# EAGLE board radical-pneu (EAGLE 7.2.0)
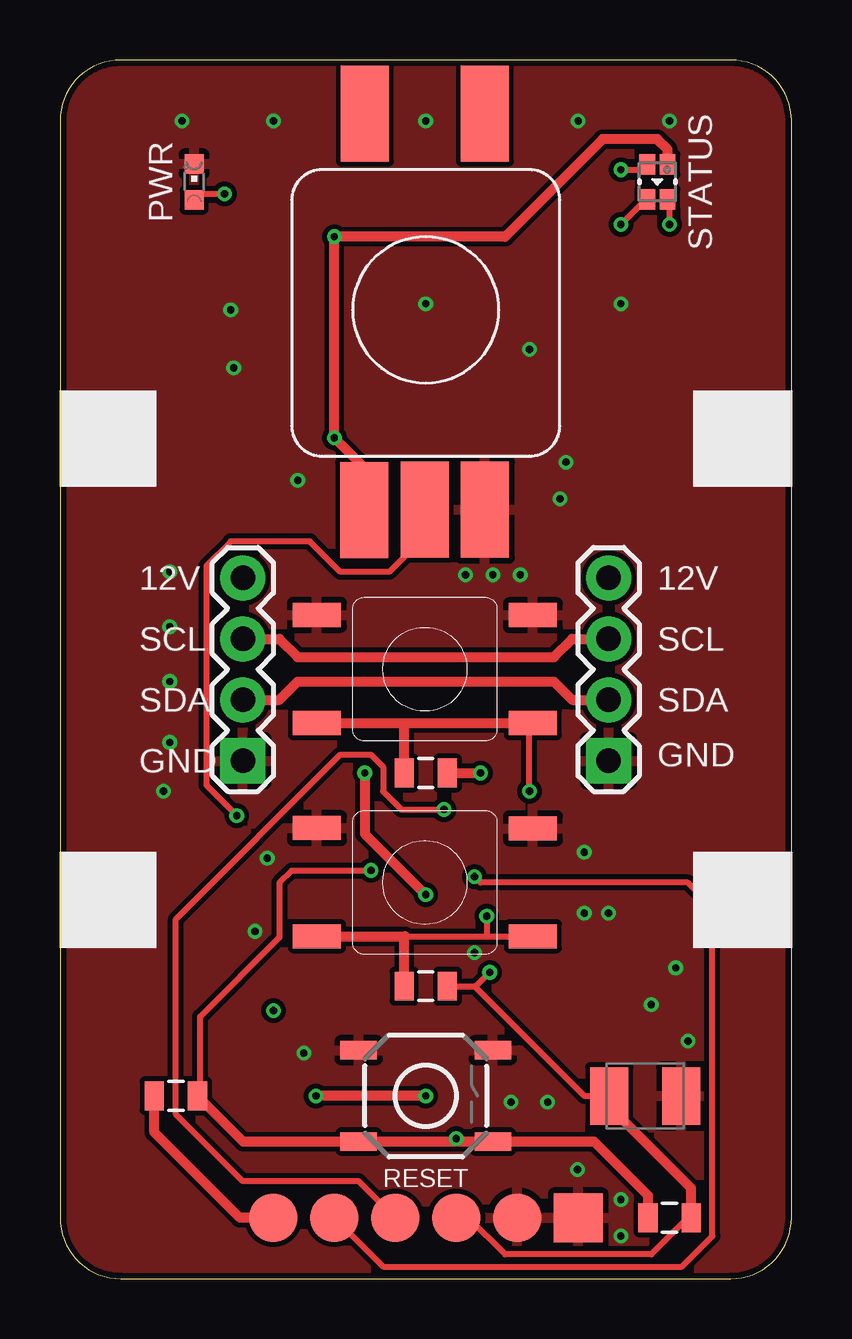
[diagram p0: board, top side]
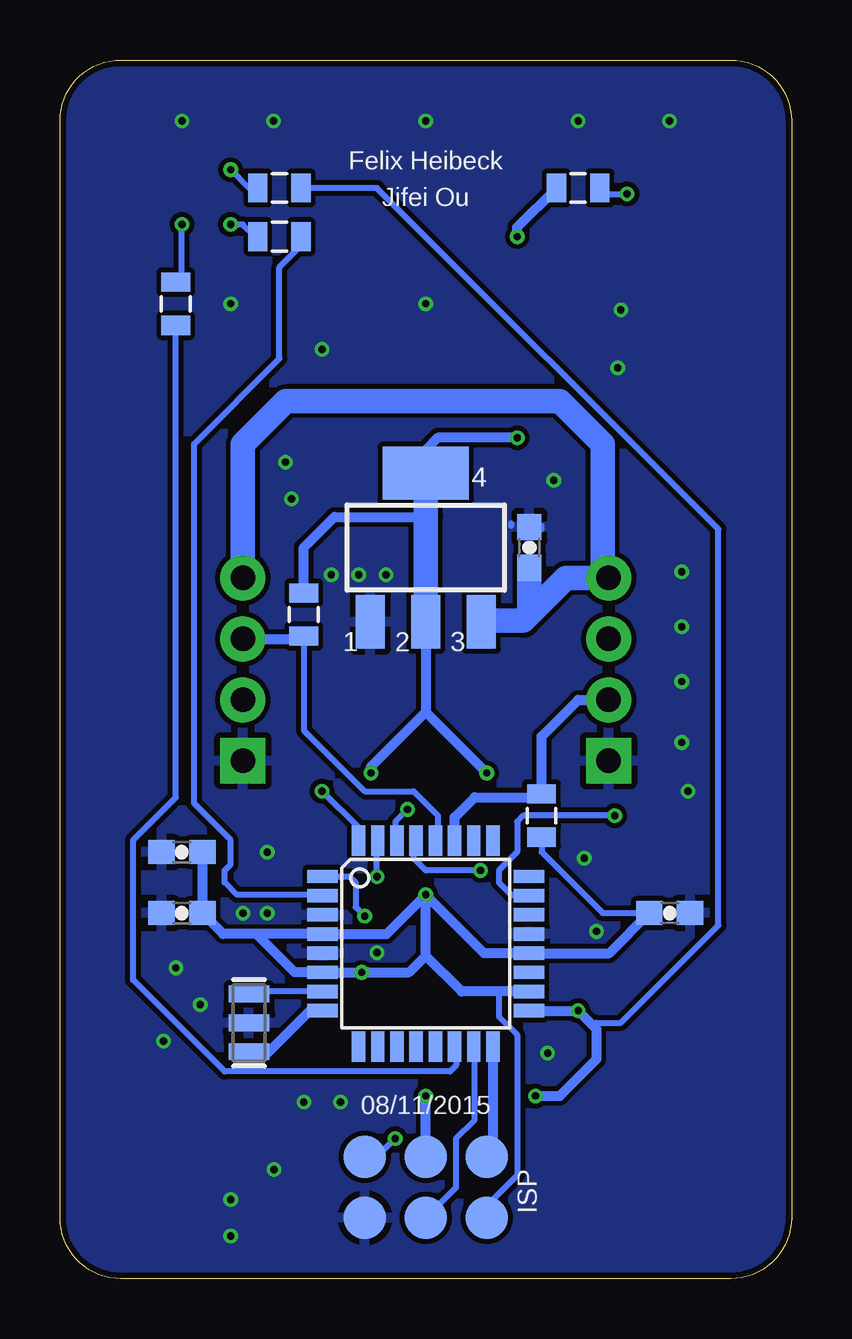
[diagram p1: board, bottom side, seen from below]

Size 30.48 x 50.8 mm. Coordinates in mm from the lower left corner, seen from the top.
Outline: 2.54,0 27.94,0 arc90 30.48,2.54 30.48,48.26 arc90 27.94,50.8 2.54,50.8 arc90 0,48.26 0,2.54 arc90 2.54,0
Copper layers (1*16): Top 0.035mm / dielectric 1.5mm / Bottom 0.035mm
Design rules "autoroute-10mil *": minimum track width 10mil, minimum drill 12mil, track to track 8mil, track to pad 8mil, pad to pad 8mil, via to via 8mil, smd to smd 0mil, copper to edge 10mil, drill to drill 10mil, minimum pad ring 10mil, minimum via ring 6mil, stop-mask expansion 2mil, vias tented up to drill 100mil, thermal gap 10mil
Net classes: 1 vcc: width 0.254 mm

## Footprints (pad centres in the part's own frame; a part is rotated, then mirrored left to right if it is on the bottom)
0603-CAP = smd 1.1 x 1: 1 -0.85,0; 2 0.85,0
SMC_B = smd 1.6 x 2.4: + -1.5,0; - 1.5,0
0805 = smd 0.8 x 1.2: 1 -0.9,0; 2 0.9,0
TQFP32-08 = smd 1.27 x 0.559: 1 -4.293,2.8; 2 -4.293,2; 3 -4.293,1.2; 4 -4.293,0.4; 5 -4.293,-0.4; 6 -4.293,-1.2; 7 -4.293,-2; 8 -4.293,-2.8; 17 4.293,-2.8; 18 4.293,-2; 19 4.293,-1.2; 20 4.293,-0.4; 21 4.293,0.4; 22 4.293,1.2; 23 4.293,2; 24 4.293,2.8 | smd 0.559 x 1.27: 9 -2.8,-4.293; 10 -2,-4.293; 11 -1.2,-4.293; 12 -0.4,-4.293; 13 0.4,-4.293; 14 1.2,-4.293; 15 2,-4.293; 16 2.8,-4.293; 25 2.8,4.293; 26 2,4.293; 27 1.2,4.293; 28 0.4,4.293; 29 -0.4,4.293; 30 -1.2,4.293; 31 -2,4.293; 32 -2.8,4.293
1X04 = drill 1.016 pad 1.88 square: 1 0,0 | drill 1.016 pad 1.88: 2 2.54,0; 3 5.08,0; 4 7.62,0
CHIPLED_0603 = smd 0.8 x 0.8: A 0,-0.75; C 0,0.75
RESONATOR-SMD = smd 0.7 x 1.7: 1 -1.2,0; 2 0,0; 3 1.2,0
TACTILE-SWITCH-SMD = smd 1.524 x 0.762: 1 -2.794,1.905; 2 2.794,1.905; 3 -2.794,-1.905; 4 2.794,-1.905
LINEAR_SOT223 = smd 1.219 x 2.235: 1 -2.311,-3.099; 2 0,-3.099; 3 2.311,-3.099 | smd 3.6 x 2.2: 4 0,3.099
SWITCH-11MM = smd 2 x 1: A -4.46,2.24; B -4.46,-2.26; D 4.54,-2.27; H 4.54,2.24
PRS11S = smd 2 x 4: 1 -2.565,-8.611; 2 -0.051,-8.585; 3 2.464,-8.585; 4 -2.54,7.925; 5 2.464,7.925
POGO_ISP = smd 1.778 x 1.778: 1 -1.27,2.54; 2 1.27,2.54; 3 -1.27,0; 4 1.27,0; 5 -1.27,-2.54; 6 1.27,-2.54
FTDI_POGO = smd 2.032 x 2.032: 1 -6.35,0; 2 -3.81,0; 3 -1.27,0; 4 1.27,0; 5 3.81,0; 6 6.35,0
LTST = smd 0.65 x 0.85: + 0.425,0.725; B -0.425,0.725; G 0.425,-0.725; R -0.425,-0.725

## Placement (x,y rotation side)
C1  0.1uF  [0603-CAP]  10.92,30.48 90 bottom
C2  0.1uF  [0603-CAP]  5.08,15.24 0 bottom
C3  22uF  [SMC_B]  24.38,7.62 0 top
C5  0.1uF  [0805]  4.83,7.62 180 top
C8  0.1uF  [0603-CAP]  25.4,15.24 180 bottom
C10  0.1uF  [0603-CAP]  25.4,17.78 180 bottom
IC3  ATMEGA328  [TQFP32-08]  15.24,13.97 0 bottom
JP2  [1X04]  22.86,21.59 90 top
JP3  [1X04]  7.62,21.59 90 top
PWR  [CHIPLED_0603]  5.59,45.72 0 top
Q1  16Mhz  [RESONATOR-SMD]  22.61,10.67 90 bottom
R1  10K  [0805]  15.24,21.08 180 top
R2  10K  [0805]  15.24,12.19 180 top
R3  10K  [0805]  25.4,2.54 180 top
R5  4.7k  [0805]  10.41,19.3 90 bottom
R6  4.7k  [0805]  20.32,27.69 90 bottom
R9  1k  [0805]  21.34,43.43 0 bottom
R11  1k  [0805]  8.89,45.47 180 bottom
R12  1k  [0805]  25.65,40.64 270 bottom
R13  1k  [0805]  21.34,45.47 0 bottom
S1  TAC_SWITCHSMD  [TACTILE-SWITCH-SMD]  15.24,7.62 0 top
U2  NCP1117-5  [LINEAR_SOT223]  15.24,30.48 0 bottom
U$1  RS-014R05  [SWITCH-11MM]  15.24,25.4 180 top
U$2  PRS11S  [PRS11S]  15.24,40.64 0 top
U$3  RS-014R05  [SWITCH-11MM]  15.24,16.51 180 top
U$10  ISP_POGO  [POGO_ISP]  15.24,3.81 270 bottom
U$12  FTDI_POGO  [FTDI_POGO]  15.24,2.54 0 top
U$21  LTST-C19FD1WT  [LTST]  24.89,45.72 0 top

## Library data of the parts
C1 C2 C5 C8 C10 = SparkFun-Capacitors
C3 = rcl
IC3 Q1 = SparkFun
JP2 JP3 = SparkFun-Connectors
PWR = adafruit
R1-R3 R5 R6 R9 R11-R13 = SparkFun-Resistors
S1 = SparkFun-Electromechanical; PROD_ID: SWCH-08247
U2 = SmartPrj
U$1-U$3 U$10 U$12 U$21 = digikey

## Nets
+5V: C2.1 C3.+ C8.1 C10.1 IC3.4 IC3.6 IC3.18 IC3.20 R1.1 R2.1 R3.1 R5.1 R6.2 R11.2 U2.2 U2.4 U$2.1 U$10.2 U$12.4 U$21.+
A0/POT: IC3.23 U$2.2
D2/BTN: IC3.32 R1.2 U$1.A U$1.H
D3/BTN: IC3.1 R2.2 U$3.A U$3.H
D4: IC3.2 R9.2
D5: IC3.9
D6: IC3.10
D7: IC3.11
D8: IC3.12
D9: IC3.13
D10: IC3.14 R12.2
DTR: C5.2 U$12.1
GND: C1.2 C2.2 C3.- C8.2 C10.2 IC3.3 IC3.5 IC3.21 JP2.1 JP3.1 PWR.C Q1.2 S1.1 S1.2 U2.1 U$1.B U$1.D U$2.3 U$3.B U$3.D U$10.6 U$12.5 U$12.6
MISO: IC3.16 U$10.1
MOSI: IC3.15 U$10.4
N$4: IC3.8 Q1.1
N$8: IC3.7 Q1.3
N$10: PWR.A R11.1
N$11: R9.1 U$21.R
N$12: R12.1 U$21.G
N$13: R13.1 U$21.B
RESET: C5.1 IC3.29 R3.2 S1.3 S1.4 U$10.5
RX: IC3.30 U$12.3
SCK: IC3.17 R13.2 U$10.3
SCL: IC3.28 JP2.3 JP3.3 R6.1
SDA: IC3.27 JP2.2 JP3.2 R5.2
TX: IC3.31 U$12.2
VIN: C1.1 JP2.4 JP3.4 U2.3

## Tracks (layer width: path | path; a pad name or v marks a point on that pad's centre or on a via)
+5V  (via drill 0.3)
  Top 0.254: U$12.4 17.02,2.54 18.54,1.02 24.64,1.02 26.16,2.54 R3.1 | C3.+ 21.84,7.62 17.27,12.19 R2.1 17.33,12.19 v17.91,12.77
  Top 0.406: C3.+ 22.88,7.19 26.29,3.79 26.29,2.55 R3.1 | v12.7,21.08 12.7,18.54 v15.24,16 | U$2.1 12.68,33.81 v11.43,35.05 v11.43,43.43 18.54,43.43 22.61,47.5 24.89,47.5 25.32,47.07 U$21.+ | R1.1 v17.53,21.08
  Bottom 0.254: U$10.2 12.7,3.05 11.43,4.32 11.43,10.16 12.19,10.92 12.19,11.97 | R5.1 10.41,17.78 7.87,15.24 C2.1
  Bottom 0.406: C10.1 C8.1 23.68,14.37 22.3,14.37 | 22.3,14.37 IC3.4 16.87,14.37 v15.24,16 | 22.3,14.37 20.7,12.77 IC3.6 v17.91,12.77 17.65,12.77 15.93,12.77 15.24,13.46 | U2.2 15.24,23.62 | 15.24,23.62 v12.7,21.08 | v15.24,16 12.81,13.57 IC3.20 7.6,13.57 C2.1 | IC3.18 12.19,11.97 13.75,11.97 15.24,13.46 | 15.24,13.46 v15.24,16 | v11.43,35.05 14.73,35.05 15.24,34.54 U2.4 | v11.43,43.43 11.43,43.83 R11.2 | R6.2 20.32,30.48 19.05,31.75 15.24,31.75 | v17.53,21.08 17.53,21.34 15.24,23.62
  Bottom 1.016: U2.2 15.24,31.75 U2.4
A0/POT  (via drill 0.3)
  Top 0.254: v7.37,19.3 6.1,20.57 6.1,29.72 7.11,30.73 10.41,30.73 11.68,29.46 13.72,29.46 14.99,30.73 14.99,32 U$2.2
  Bottom 0.254: v7.37,19.3 11.18,19.3 11.43,19.05 11.43,17.78 12.19,17.02 12.19,16.51 11.68,16 11.18,16 IC3.23
D2/BTN  (via drill 0.3)
  Top 0.254: v19.56,20.32 19.56,23.02 U$1.A
  Top 0.406: U$1.H 14.27,23.16 | 14.27,23.16 U$1.A | R1.2 14.34,23.09 14.27,23.16
  Bottom 0.254: IC3.32 18.04,18.8 v19.56,20.32
D3/BTN  (via drill 0.3)
  Top 0.254: 14.38,14.27 17.78,14.27 | 17.78,14.27 U$3.A | v17.78,15.11 17.78,14.27
  Top 0.406: U$3.H 14.38,14.27 14.34,14.23 R2.2
  Bottom 0.254: IC3.1 18.42,16.77 18.16,16.51 18.16,15.49 v17.78,15.11
D4
  Bottom 0.254: R9.2 20.57,43.43 20.57,42.93 21.34,42.16 21.34,38.35 24.89,34.8 24.89,19.81 23.37,18.29 23.37,17.27 23.62,17.02 23.62,16.51 23.11,16 19.56,16 IC3.2
D10
  Bottom 0.254: R12.2 25.65,20.07 27.43,18.29 27.43,12.45 23.62,8.64 14.22,8.64 13.97,8.89 13.97,9.65 IC3.14
DTR
  Top 0.406: U$12.1 7.49,2.54 3.94,6.1 C5.2
GND  (via drill 0.3)
  Bottom 0.254: U$10.6 18.54,2.54 | 10.41,31.24 10.41,31.38 | 11.68,31.5 11.68,31.38
  other vias: 5.08,48.26 15.24,48.26 21.59,48.26 21.56,4.55 25.4,48.26 23.37,1.78 4.57,29.46 4.32,20.32 4.57,27.18 4.57,24.89 4.57,22.35 23.37,3.3 8.89,48.26 9.91,33.27 20.83,32.51 7.11,40.39 15.24,40.64 23.37,40.64 21.84,17.78 24.64,11.43 20.32,7.37 18.8,7.37 10.16,9.4 8.64,17.53 8.13,14.48 25.65,12.95 26.16,9.91 22.86,15.24 21.84,15.24 17.27,13.59 18.03,29.34 19.18,29.34 21.08,34.04 19.56,38.73 7.24,37.97 16.89,29.34
  pour Bottom: 0.25,55.12 30.73,55.37 30.73,-2.79 0.25,-3.05
  pour Top: -1.02,54.36 30.73,54.36 30.73,-2.29 -1.02,-2.29
MISO
  Bottom 0.406: IC3.16 12.44,5.34 U$10.1
MOSI
  Bottom 0.254: U$10.4 13.97,3.81 13.97,5.84 13.21,6.6 13.21,9.65 IC3.15
N$4
  Bottom 0.254: 21.84,9.4 22.54,9.4 Q1.1
  Bottom 0.406: IC3.8 20.07,11.17 21.84,9.4
N$8
  Bottom 0.254: IC3.7 22.5,11.97 Q1.3
N$10  (via drill 0.3)
  Top 0.254: v6.86,45.21 5.59,45.21 PWR.A
  Bottom 0.254: v6.86,45.21 7.62,45.21 7.87,45.47 R11.1
N$11  (via drill 0.3)
  Top 0.254: v23.37,43.94 24.38,44.96 U$21.R
  Bottom 0.254: v23.37,43.94 22.86,43.94 22.35,43.43 R9.1
N$12  (via drill 0.3)
  Top 0.254: v25.4,43.94 25.4,44.96 U$21.G
  Bottom 0.254: v25.4,43.94 25.4,41.91 25.65,41.66 R12.1
N$13  (via drill 0.3)
  Top 0.254: v23.37,46.23 24.38,46.23 U$21.B
  Bottom 0.254: v23.37,46.23 22.61,45.47 R13.1
RESET  (via drill 0.3)
  Top 0.254: v12.95,17.02 9.65,17.02 9.14,16.51 9.14,14.22 5.84,10.92 5.84,7.62 C5.1 | v16.51,5.84 16.51,5.71
  Top 0.406: C5.1 7.63,5.71 S1.3 16.51,5.71 S1.4 22.25,5.71 24.5,3.46 R3.2
  Bottom 0.254: v12.95,17.02 15.24,17.02 15.75,17.53 15.75,18.03 IC3.29 | U$10.5 17.27,5.08 v16.51,5.84
RX  (via drill 0.3)
  Top 0.254: v16,19.56 14.22,19.56 13.46,20.32 13.46,21.34 12.95,21.84 11.68,21.84 4.83,14.99 4.83,6.86 7.62,4.06 12.45,4.06 U$12.3
  Bottom 0.254: v16,19.56 16.51,19.05 16.51,18.29 IC3.30
SCK  (via drill 0.3)
  Top 0.406: v15.24,7.62 v10.67,7.62
  Bottom 0.254: R13.2 17.27,45.47 3.05,31.24 3.05,14.73 7.11,10.67 8.13,10.67 8.25,10.54
  Bottom 0.406: U$10.3 v15.24,7.62 | v10.67,7.62 9.65,7.62 8.13,9.14 8.13,10.41 8.25,10.54 v8.88,11.17 IC3.17 v8.9,11.17 v8.89,11.18
SCL
  Top 0.406: JP3.3 9.14,26.67 9.91,25.91 20.57,25.91 21.34,26.67 JP2.3
  Bottom 0.254: R6.1 20.32,22.86 17.78,20.32 15.75,20.32 14.73,19.3 14.73,18.29 IC3.28
  Bottom 0.406: JP2.3 20.44,26.67 R6.1
SDA
  Top 0.406: JP3.2 9.14,24.13 9.91,24.89 20.57,24.89 21.34,24.13 JP2.2
  Bottom 0.406: IC3.27 14.04,19.23 13.21,20.07 10.55,20.07 R5.2 10.41,22.61 8.89,24.13 JP3.2
TX  (via drill 0.3)
  Top 0.254: U$12.2 13.46,0.51 25.91,0.51 27.18,1.78 27.18,15.49 26.16,16.51 17.53,16.51 v17.27,16.76
  Bottom 0.254: v17.27,16.76 17.27,18.03 IC3.31
VIN
  Bottom 0.406: U2.3 12.95,27.38 12.95,27.18
  Bottom 1.016: JP3.4 7.87,29.21 | 7.87,29.21 9.4,29.21 10.8,27.81 | 10.8,27.81 11.18,27.43 12.88,27.43 U2.3 | C1.1 10.92,27.94 10.8,27.81 | 7.87,29.21 7.87,34.8 9.65,36.58 21.08,36.58 22.86,34.8 JP2.4

## Text on the board
tPlace: STATUS
tNames: 12V | 12V | SCL | SCL | SDA | SDA | GND | GND | RESET
bNames: Felix Heibeck | Jifei Ou | 08/11/2015